# Altium PCB AFE_mezzanine_filt.PcbDoc
Units mm, origin at the board's own origin, x right, y up, seen from the top; angles counter-clockwise.
Board outline 100.05 x 34.55 mm, 2 copper layers (Top Layer, Bottom Layer), stack 1.071 mm thick; 116 components, 99 nets, 450 pads, 12 vias.
Unrouted connection lines stored in the file: 299.
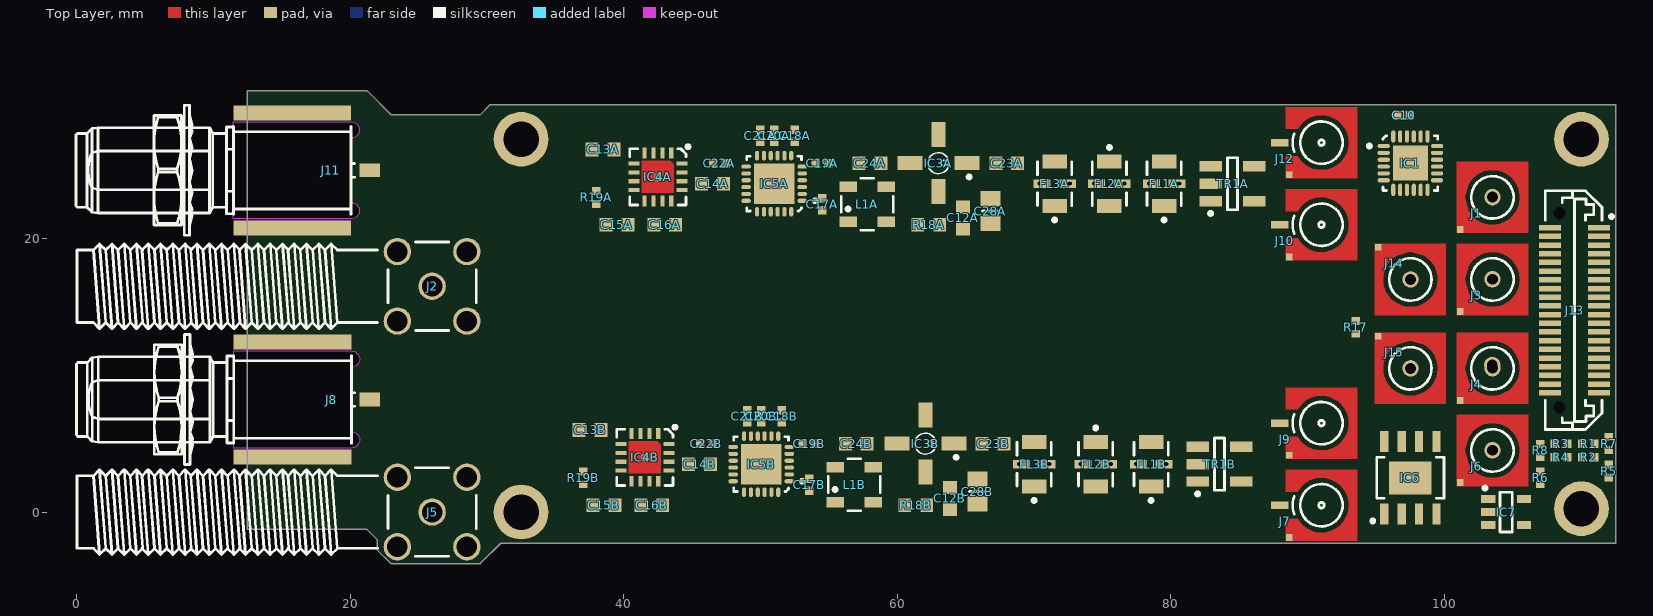
[diagram p0: Top Layer view]
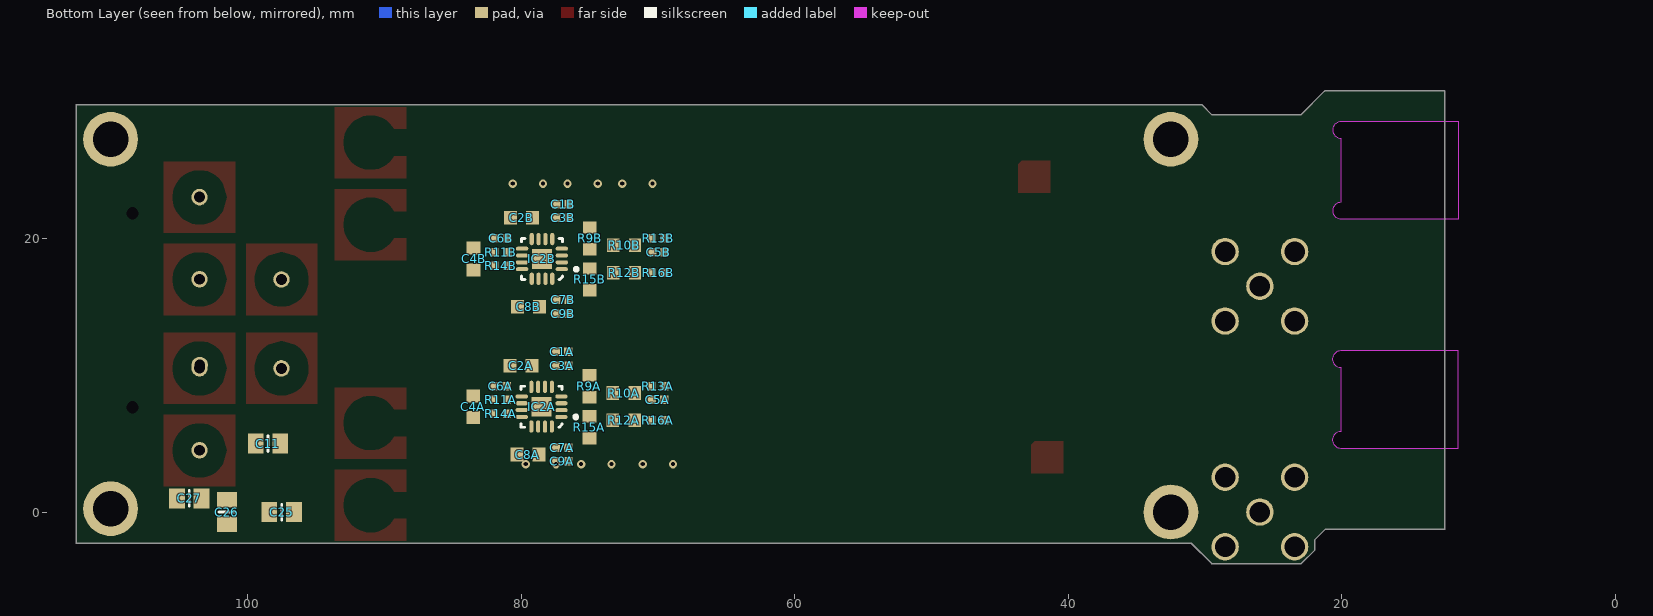
[diagram p1: Bottom Layer view, seen from below]

## Layer stack, top to bottom
Top Solder: solder mask 0.0102, Solder Resist, Dk 3.5
Top Layer: signal copper 0.0356
Dielectric1: core 1, FR-4, Dk 4.8
Bottom Layer: signal copper 0.0356
Bottom Solder: solder mask 0.0102, Solder Resist, Dk 3.5

## Board outline
21.239,-1.275 21.975,-2.011 21.975,-2.75 ccw(c22,-2.75) 21.982,-2.768 22.982,-3.768 cw(c23,-3.75) 22.982,-3.768 ccw(c23,-3.75) 23,-3.775 29.5,-3.775 ccw(c29.5,-3.75) 29.518,-3.768 31.011,-2.275 112.5,-2.275 ccw(c112.5,-2.25) 112.525,-2.25 112.525,29.75 ccw(c112.5,29.75) 112.5,29.775 30.25,29.775 ccw(c30.25,29.75) 30.232,29.768 cw(c30.25,29.75) 30.232,29.768 29.489,29.025 23.011,29.025 21.268,30.768 cw(c21.25,30.75) 21.268,30.768 ccw(c21.25,30.75) 21.25,30.775 12.5,30.775 ccw(c12.5,30.75) 12.475,30.75 12.475,-1.25 ccw(c12.5,-1.25) 12.5,-1.275

## Design rules (kind name [scope] priority, off if disabled: settings)
Clearance [All] p1: gap=0.254
DiffPairsRouting [All] p1: maxlimit=0.254 minlimit=0.254 mostfreqgap=0.254 toplayer_minwidth=0.381 toplayer_maxwidth=0.381 toplayer_prefwidth=0.381 bottomlayer_minwidth=0.381 bottomlayer_maxwidth=0.381 bottomlayer_prefwidth=0.381 maxuncoupledlength=12.7
PolygonConnect [All] p1: connectstyle=Relief reliefconductorwidth=0.254 reliefentries=4 polygonreliefangle="90 Angle" airgapwidth=0.254
RoomDefinition U_ADC_channel2 [InComponentClass('U_ADC_channel2')] p1: confinementstyle=ConfineIn formatcopy=TRUE lockcomponents=FALSE outline 67.97,23.5 85.97,23.5 85.97,13.5 67.97,13.5
RoomDefinition U_ADC_channel1 [InComponentClass('U_ADC_channel1')] p2: confinementstyle=ConfineIn formatcopy=TRUE lockcomponents=FALSE outline 68,12.7 86,12.7 86,2.7 68,2.7
RoomDefinition U_DAC_channel2 [InComponentClass('U_DAC_channel2')] p3: confinementstyle=ConfineIn formatcopy=TRUE lockcomponents=FALSE outline 35.55,-3 86.55,-3 86.55,9 35.55,9
RoomDefinition U_DAC_channel1 [InComponentClass('U_DAC_channel1')] p4: confinementstyle=ConfineIn formatcopy=TRUE lockcomponents=FALSE outline 36.5,17.5 87.5,17.5 87.5,29.5 36.5,29.5
RoomDefinition AFE_mezzanine [InComponentClass('AFE_mezzanine')] p5: confinementstyle=ConfineIn formatcopy=TRUE lockcomponents=FALSE outline 112.5,-1.75 86,-1.75 86,29.75 112.5,29.75
RoutingVias [All] p1: holewidth=0.711 width=1.27 viastyle="Through Hole" minholewidth=0.711 minwidth=1.27 maxholewidth=0.711 maxwidth=1.27
SilkToSolderMaskClearance SilkscreenOverComponentPads [IsPad] p1: minsilkscreentomaskgap=0.254 clearancetoexposedcopper=TRUE
SolderMaskExpansion [All] p1: expansion=0.102
Width [All] p1: maxlimit=0.254 minlimit=0.254 preferedwidth=0.254
28 further rules are at their usual default settings.

## Classes and differential pairs
component class U_DAC_channel2: C12B C13B C14B C15B C16B C17B C18B C19B C20B C21B C22B C23B C24B C28B FL1B FL2B FL3B IC3B IC4B IC5B L1B R18B R19B TR1B
component class U_DAC_channel1: C12A C13A C14A C15A C16A C17A C18A C19A C20A C21A C22A C23A C24A C28A FL1A FL2A FL3A IC3A IC4A IC5A L1A R18A R19A TR1A
component class U_ADC_channel2: C1B C2B C3B C4B C5B C6B C7B C8B C9B IC2B R9B R10B R11B R12B R13B R14B R15B R16B
component class U_ADC_channel1: C1A C2A C3A C4A C5A C6A C7A C8A C9A IC2A R9A R10A R11A R12A R13A R14A R15A R16A
channel class DAC_channel: U_DAC_channel1 U_DAC_channel2
channel class ADC_channel: U_ADC_channel1 U_ADC_channel2
component class AFE_mezzanine: C10 C11 C25 C26 C27 IC1 IC6 IC7 J1 J2 J3 J4 J5 J6 J7 J8 J9 J10 J11 J12 J13 J14 J15 R1 R2 R3 R4 R5 R6 R7 R8 R17
differential pair LO_IN: +LO_IN_P -LO_IN_N
differential pair DAC2_OUT: +DAC2_OUT_P -DAC2_OUT_N
differential pair DAC1_OUT: +DAC1_OUT_P -DAC1_OUT_N
differential pair ADC2_IN: +ADC2_IN_P -ADC2_IN_N
differential pair ADC1_IN: +ADC1_IN_P -ADC1_IN_N

## Components (designator, comment, footprint, x,y, rotation, side; value= is the part's Value field where it differs from the comment)
C1A "100nF" CAPC1005X55N 77,11.7 r0 bottom (schematic designator C1)
C1B "100nF" CAPC1005X55N 76.97,22.5 r0 bottom (schematic designator C1)
C2A "10uF" CAPC1608X87N 80,10.7 r180 bottom (schematic designator C2)
C2B "10uF" CAPC1608X87N 79.97,21.5 r180 bottom (schematic designator C2)
C3A "1nF" CAPC1005X55N 77,10.7 r0 bottom (schematic designator C3)
C3B "1nF" CAPC1005X55N 76.97,21.5 r0 bottom (schematic designator C3)
C4A "10pF" CAPC1608X87N 83.5,7.7 r90 bottom (schematic designator C4)
C4B "10pF" CAPC1608X87N 83.47,18.5 r90 bottom (schematic designator C4)
C5A "100nF" CAPC1005X55N 70,8.2 r180 bottom (schematic designator C5)
C5B "100nF" CAPC1005X55N 69.97,19 r180 bottom (schematic designator C5)
C6A "100nF" CAPC1005X55N 81.5,9.2 r180 bottom (schematic designator C6)
C6B "100nF" CAPC1005X55N 81.47,20 r180 bottom (schematic designator C6)
C7A "100nF" CAPC1005X55N 77,4.7 r0 bottom (schematic designator C7)
C7B "100nF" CAPC1005X55N 76.97,15.5 r0 bottom (schematic designator C7)
C8A "10uF" CAPC1608X87N 79.5,4.2 r180 bottom (schematic designator C8)
C8B "10uF" CAPC1608X87N 79.47,15 r180 bottom (schematic designator C8)
C9A "1nF" CAPC1005X55N 77,3.7 r0 bottom (schematic designator C9)
C9B "1nF" CAPC1005X55N 76.97,14.5 r0 bottom (schematic designator C9)
C10 "100nF" CAPC1005X55N 97,29 r0 top
C11 "1uF" CAPC2012X140N 98.5,5 r0 bottom
C12A "100nF" CAPC1608X87N 64.8,21.5 r270 top (schematic designator C12)
C12B "100nF" CAPC1608X87N 63.85,1 r270 top (schematic designator C12)
C13A "100nF" CAPC1608X87N 38.5,26.5 r0 top (schematic designator C13)
C13B "100nF" CAPC1608X87N 37.55,6 r0 top (schematic designator C13)
C14A "100nF" CAPC1608X87N 46.5,24 r0 top (schematic designator C14)
C14B "100nF" CAPC1608X87N 45.55,3.5 r0 top (schematic designator C14)
C15A "100nF" CAPC1608X87N 39.5,21 r0 top (schematic designator C15)
C15B "100nF" CAPC1608X87N 38.55,0.5 r0 top (schematic designator C15)
C16A "100nF" CAPC1608X87N 43,21 r0 top (schematic designator C16)
C16B "100nF" CAPC1608X87N 42.05,0.5 r0 top (schematic designator C16)
C17A "330pF" CAPC1005X55N 54.5,22.5 r90 top (schematic designator C17)
C17B "330pF" CAPC1005X55N 53.55,2 r90 top (schematic designator C17)
C18A "330pF" CAPC1005X55N 52.5,27.5 r270 top (schematic designator C18)
C18B "330pF" CAPC1005X55N 51.55,7 r270 top (schematic designator C18)
C19A "330pF" CAPC1005X55N 54.5,25.5 r180 top (schematic designator C19)
C19B "330pF" CAPC1005X55N 53.55,5 r180 top (schematic designator C19)
C20A "330pF" CAPC1005X55N 51,27.5 r270 top (schematic designator C20)
C20B "330pF" CAPC1005X55N 50.05,7 r270 top (schematic designator C20)
C21A "330pF" CAPC1005X55N 50,27.5 r270 top (schematic designator C21)
C21B "330pF" CAPC1005X55N 49.05,7 r270 top (schematic designator C21)
C22A "330pF" CAPC1005X55N 47,25.5 r0 top (schematic designator C22)
C22B "330pF" CAPC1005X55N 46.05,5 r0 top (schematic designator C22)
C23A "100nF" CAPC1608X87N 68,25.5 r0 top (schematic designator C23)
C23B "100nF" CAPC1608X87N 67,5 r0 top (schematic designator C23)
C24A "100nF" CAPC1608X87N 58,25.5 r0 top (schematic designator C24)
C24B "100nF" CAPC1608X87N 57,5 r0 top (schematic designator C24)
C25 "1uF" CAPC2012X140N 97.5,0 r180 bottom
C26 "1uF" CAPC2012X140N 101.5,0 r270 bottom
C27 "1uF" CAPC2012X140N 104.25,1 r0 bottom
C28A "1uF" CAPC2012X140N 66.8,22 r270 top (schematic designator C28)
C28B "1uF" CAPC2012X140N 65.85,1.5 r270 top (schematic designator C28)
FL1A "DC to 3000MHz" FIL_MINI-CIRCUITS_FV1206 79.5,24 r90 top (schematic designator FL1)
FL1B "DC to 3000MHz" FIL_MINI-CIRCUITS_FV1206 78.55,3.5 r90 top (schematic designator FL1)
FL2A "DC to 3000MHz" FIL_MINI-CIRCUITS_FV1206 75.5,24 r270 top (schematic designator FL2)
FL2B "DC to 3000MHz" FIL_MINI-CIRCUITS_FV1206 74.5,3.5 r270 top (schematic designator FL2)
FL3A "DC to 3000MHz" FIL_MINI-CIRCUITS_FV1206 71.5,24 r90 top (schematic designator FL3)
FL3B "DC to 3000MHz" FIL_MINI-CIRCUITS_FV1206 70,3.5 r90 top (schematic designator FL3)
IC1 "TCA9539RTWR" QFN50P400X400X80-25N-S255 97.5,25.5 r0 top
IC2A "ADA4927-1YCPZ-R2" QFN50P300X300X100-17N-S145 78.5,7.7 r0 bottom (schematic designator IC2)
IC2B "ADA4927-1YCPZ-R2" QFN50P300X300X100-17N-S145 78.47,18.5 r0 bottom (schematic designator IC2)
IC3A "ERA-2SM+" MINI-CIRCUITS_WW107 63,25.5 r180 top (schematic designator IC3)
IC3B "ERA-2SM+" MINI-CIRCUITS_WW107 62.05,5 r180 top (schematic designator IC3)
IC4A "CSWA2-63DR+" MINI-CIRCUITS_DG1293 42.5,24.5 r270 top (schematic designator IC4)
IC4B "CSWA2-63DR+" MINI-CIRCUITS_DG1293 41.55,4 r270 top (schematic designator IC4)
IC5A "HMC542BLP4E" QFN50P400X400X100-25N-S295 51,24 r180 top (schematic designator IC5)
IC5B "HMC542BLP4E" QFN50P400X400X100-25N-S295 50.05,3.5 r180 top (schematic designator IC5)
IC6 "ADP7102ARDZ-5.0-R7" SOIC127P600X175-9N-R241X309 97.5,2.5 r90 top
IC7 "ADP7182AUJZ-5.0-R7" SOT95P280X90-5N 104.5,0 r0 top
J1 "SMP" AMPHENOL_SMP-MSLD-PCT-10 103.5,23 r90 top
J2 "SMA" TELEGARTNER_J01151A0921 26,16.5 r0 top
J3 "SMP" AMPHENOL_SMP-MSLD-PCT-10 103.5,17 r90 top
J4 "SMP" AMPHENOL_SMP-MSLD-PCT-10 103.5,10.5 r90 top
J5 "SMA" TELEGARTNER_J01151A0921 26,0 r0 top
J6 "SMP" AMPHENOL_SMP-MSLD-PCT-10 103.5,4.5 r90 top
J7 "SMP" MOLEX_85305-0232 91,0.5 r90 top
J8 "SMA" TELEGARTNER_J01151A0451 21.45,8.224 r180 top
J9 "SMP" MOLEX_85305-0232 91,6.5 r90 top
J10 "SMP" MOLEX_85305-0232 91,21 r90 top
J11 "SMA" TELEGARTNER_J01151A0451 21.425,24.975 r180 top
J12 "SMP" MOLEX_85305-0232 91,27 r90 top
J13 "Familly" SAMTEC_LSS-120-03-L-DV-A 109.5,14.75 r90 top
J14 "SMP" AMPHENOL_SMP-MSLD-PCT-10 97.5,17 r0 top
J15 "SMP" AMPHENOL_SMP-MSLD-PCT-10 97.5,10.5 r0 top
L1A "0.5uH@200mA" IND_MINI-CIRCUITS_GU1604 57.8,22.5 r90 top (schematic designator L1)
L1B "0.5uH@200mA" IND_MINI-CIRCUITS_GU1604 56.85,2 r90 top (schematic designator L1)
R1 "10k" RESC1005X40N 110.5,5 r0 top
R2 "10k" RESC1005X40N 110.5,4 r0 top
R3 "1k" RESC1005X40N 108.5,5 r0 top
R4 "1k" RESC1005X40N 108.5,4 r0 top
R5 "1k" RESC1005X40N 112,3 r90 top
R6 "1k" RESC1005X40N 107,2.5 r90 top
R7 "10k" RESC1005X40N 112,5 r90 top
R8 "10k" RESC1005X40N 107,4.5 r90 top
R9A "332" RESC1608X55N 75,9.2 r90 bottom (schematic designator R9)
R9B "332" RESC1608X55N 74.97,20 r90 bottom (schematic designator R9)
R10A "332" RESC1608X55N 72.5,8.7 r0 bottom (schematic designator R10)
R10B "332" RESC1608X55N 72.47,19.5 r0 bottom (schematic designator R10)
R11A "49R9" RESC1005X40N 81.5,8.2 r180 bottom (schematic designator R11)
R11B "49R9" RESC1005X40N 81.47,19 r180 bottom (schematic designator R11)
R12A "332" RESC1608X55N 72.5,6.7 r0 bottom (schematic designator R12)
R12B "332" RESC1608X55N 72.47,17.5 r0 bottom (schematic designator R12)
R13A "56" RESC1005X40N 70,9.2 r0 bottom (schematic designator R13)
R13B "56" RESC1005X40N 69.97,20 r0 bottom (schematic designator R13)
R14A "49R9" RESC1005X40N 81.5,7.2 r180 bottom (schematic designator R14)
R14B "49R9" RESC1005X40N 81.47,18 r180 bottom (schematic designator R14)
R15A "332" RESC1608X55N 75,6.2 r270 bottom (schematic designator R15)
R15B "332" RESC1608X55N 74.97,17 r270 bottom (schematic designator R15)
R16A "56" RESC1005X40N 70,6.7 r0 bottom (schematic designator R16)
R16B "56" RESC1005X40N 69.97,17.5 r0 bottom (schematic designator R16)
R17 "100" RESC1005X40N 93.5,13.5 r90 top
R18A "110" RESC1608X55N 62.3,21 r180 top (schematic designator R18)
R18B "110" RESC1608X55N 61.35,0.5 r180 top (schematic designator R18)
R19A "49R9" RESC1005X40N 38,23 r90 top (schematic designator R19)
R19B "49R9" RESC1005X40N 37.05,2.5 r90 top (schematic designator R19)
TR1A "1:1" XFMR_MINI-CIRCUITS_AT224 84.5,24 r90 top (schematic designator TR1)
TR1B "1:1" XFMR_MINI-CIRCUITS_AT224 83.55,3.5 r90 top (schematic designator TR1)

## Footprints (in the part's own frame and the unit in brackets; to place one, negate y for a bottom-side part, rotate by r counter-clockwise, add the part's x,y. Pads: shape width x height; smd on the part's side, far side on the other; paste and mask are expansions set on the pad)
AMPHENOL_SMP-MSLD-PCT-10 [mm]
  round 1.2 hole 0.8: 1(0.017,0)
  rect 0.5x0.5 smd paste-0.25 mask-0.25: 2(-2.35,2.35)
  Top Layer region: -2.6,-2.6 -2.6,2.6 1,2.6 0,2.032 -1,1.732 -1.732,1 -2,0 -1.732,-1 -1,-1.732 0,-2 1,-1.732 1.732,-1 2,0 1.732,1 1,1.732 1,1.732 0,2.032 1,2.6 2.6,2.6 2.6,-2.6
  silkscreen extent -1.55,-1.55 1.55,1.55, body extent -2.52,-2.5 2.48,2.5, height 4.2
CAPC1005X55N [mm] "Chip Capacitor, Body 1.0x0.55mm, IPC Medium Density"
  rect 0.62x0.62 smd: 1(-0.45,0) 2(0.45,0)
  body extent -0.52,-0.27 0.53,0.28, height 0.55
CAPC1608X87N [mm] "Chip Capacitor, Body 1.6x0.8mm IPC Medium Density"
  rect 0.95x1 smd: 1(-0.8,0) 2(0.8,0)
  body extent -0.87,-0.47 0.88,0.48, height 0.87
CAPC2012X140N [mm] "Chip Capacitor, Body 2.0x1.25mm, IPC Medium Density"
  rect 1.15x1.45 smd: 1(-0.9,0) 2(0.9,0)
  silkscreen extent 0,-0.58 0,0.58, body extent -1.05,-0.67 1.05,0.68, height 1.3
FIL_MINI-CIRCUITS_FV1206 [mm] "MINI-CIRCUITS Case FV1206 - Body 3.2x1.6mm"
  rect 1.04x1.8 smd: 1(-1.625,0) 3(1.625,0)
  rect 0.61x1.245 smd: 2(0,-0.928) 4(0,0.927)
  silkscreen extent -2.77,-1.25 1.6,1.25, body extent -1.6,-0.8 1.6,0.8, height 0.94
IND_MINI-CIRCUITS_GU1604 [mm] "MINI-CIRCUITS RF Choke, Case GU1041 - Body 3.81X3.81mm"
  rect 0.76x1.27 smd: 1(-1.27,1.394) 2(1.27,1.396) 3(1.27,-1.394) 4(-1.27,-1.396)
  silkscreen extent -1.91,-1.91 1.91,1.91, body extent -1.9,-1.9 1.91,1.91, height 3.81
MINI-CIRCUITS_DG1293 [mm] "MINI-CIRCUITS DG1293 Case, 0.65mm Pitch, Square; 4 Pin X 4 Pin, 4mm X 4mm Body (w/Thermal Tab 2.34 X 2.34mm)"
  rect 0.8x0.3 smd: 1(-1.75,0.975) 2(-1.75,0.325) 3(-1.75,-0.325) 4(-1.75,-0.975) 9(1.75,-0.975) 10(1.75,-0.325) 11(1.75,0.325) 12(1.75,0.975)
  rect 0.3x0.8 smd: 5(-0.975,-1.75) 6(-0.325,-1.75) 7(0.325,-1.75) 8(0.975,-1.75) 13(0.975,1.75) 14(0.325,1.75) 15(-0.325,1.75) 16(-0.975,1.75)
  rect 0.5x0.5 smd paste-0.25 mask-0.25: 17(0,0)
  Top Layer region: -1.17,-1.17 1.17,-1.17 1.17,1.17 -0.92,1.17 -1.17,0.92
  silkscreen extent -2.32,-2.05 2.05,2.33, body extent -2.05,-2.05 2.06,2.06, height 1.2
MINI-CIRCUITS_WW107 [mm] "MINI-CIRCUITS WW107 Case"
  rect 1.83x1.02 smd: 1(-2.085,0) 3(2.085,0)
  rect 1.02x1.83 smd: 2(0,-2.085) 4(0,2.085)
  silkscreen extent -2.38,-0.77 0.77,1.12, body extent -2.84,-2.54 2.54,2.54, height 1.52
MOLEX_85305-0232 [mm] "50 Ohms, SMP Surface Mount Plug, Limited Detent"
  rect 0.54x1.3 smd: 1(0,3.05)
  rect 0.5x0.5 smd paste-0.25 mask-0.25: 2(-2.35,2.35)
  Top Layer region: -2.6,-2.6 -2.6,2.6 -1,2.6 -1,1.732 -1.732,1 -2,0 -1.732,-1 -1,-1.732 0,-2 1,-1.732 1.732,-1 2,0 1.732,1 1,1.732 1,1.732 1,2.6 2.6,2.6 2.6,-2.6
  silkscreen extent -1.55,-1.55 1.55,2.1, body extent -2.54,-2.54 2.54,3.54, height 4.1
QFN50P300X300X100-17N-S145 [mm] "QFN,0.50mm Pitch, Square; 4 Pin X 4 Pin, 3mm X 3mm X 1.00mm H Body (w/Thermal Tab 1.45 X 1.45mm), IPC Medium Density"
  oval 0.9x0.3 smd: 1(-1.45,0.75) 2(-1.45,0.25) 3(-1.45,-0.25) 4(-1.45,-0.75) 9(1.45,-0.75) 10(1.45,-0.25) 11(1.45,0.25) 12(1.45,0.75)
  oval 0.3x0.9 smd: 5(-0.75,-1.45) 6(-0.25,-1.45) 7(0.25,-1.45) 8(0.75,-1.45) 13(0.75,1.45) 14(0.25,1.45) 15(-0.25,1.45) 16(-0.75,1.45)
  rect 1.45x1.45 smd: 17(0,0)
  silkscreen extent -2.62,-1.5 1.5,1.5, body extent -1.57,-1.57 1.58,1.58, height 1
QFN50P400X400X80-25N-S255 [mm] "QFN, 0.50mm Pitch, Square; 6 Pin X 6 Pin, 4mm X 4mm Body (w/Thermal Tab 2.55 X 2.55 mm), IPC Medium Density"
  oval 0.9x0.3 smd: 1(-1.95,1.25) 2(-1.95,0.75) 3(-1.95,0.25) 4(-1.95,-0.25) 5(-1.95,-0.75) 6(-1.95,-1.25) 13(1.95,-1.25) 14(1.95,-0.75) 15(1.95,-0.25) 16(1.95,0.25) 17(1.95,0.75) 18(1.95,1.25)
  oval 0.3x0.9 smd: 7(-1.25,-1.95) 8(-0.75,-1.95) 9(-0.25,-1.95) 10(0.25,-1.95) 11(0.75,-1.95) 12(1.25,-1.95) 19(1.25,1.95) 20(0.75,1.95) 21(0.25,1.95) 22(-0.25,1.95) 23(-0.75,1.95) 24(-1.25,1.95)
  rect 2.55x2.55 smd: 25(0,0)
  silkscreen extent -3.12,-2 2,2, body extent -2.07,-2.07 2.08,2.08, height 0.8
QFN50P400X400X100-25N-S295 [mm] "QFN,0.50mm pitch,square;24 pin,4.00mm L X 4.00mm W X 1.00mm H body (w/thermal tab 2.95 X 2.95mm),  IPC Medium Density"
  oval 0.7x0.3 smd: 1(-2.05,1.25) 2(-2.05,0.75) 3(-2.05,0.25) 4(-2.05,-0.25) 5(-2.05,-0.75) 6(-2.05,-1.25) 13(2.05,-1.25) 14(2.05,-0.75) 15(2.05,-0.25) 16(2.05,0.25) 17(2.05,0.75) 18(2.05,1.25)
  oval 0.3x0.7 smd: 7(-1.25,-2.05) 8(-0.75,-2.05) 9(-0.25,-2.05) 10(0.25,-2.05) 11(0.75,-2.05) 12(1.25,-2.05) 19(1.25,2.05) 20(0.75,2.05) 21(0.25,2.05) 22(-0.25,2.05) 23(-0.75,2.05) 24(-1.25,2.05)
  rect 2.95x2.95 smd: 25(0,0)
  silkscreen extent -3.13,-2 2,2, body extent -2.07,-2.07 2.08,2.08, height 1
RESC1005X40N [mm] "Chip Resistor, EIA 0402, Metric 1005, Body 1.0x0.5mm, IPC Medium Density"
  rect 0.58x0.62 smd: 1(-0.47,0) 2(0.47,0)
  body extent -0.52,-0.27 0.53,0.28, height 0.4
RESC1608X55N [mm] "Chip Resistor, EIA 0603, Metric 1608, Body 1.6x0.8mm, IPC Medium Density"
  rect 0.9x1 smd: 1(-0.8,0) 2(0.8,0)
  body extent -0.87,-0.47 0.88,0.48, height 0.55
SAMTEC_LSS-120-03-L-DV-A [mm] "40 Contacts, Pitch 0.635mm, Razor Beam LSS Vertical High Speed Hermaphroditic Strip (Lead Style 5.49mm)"
  rect 0.4x1.6 smd: 1(6.032,-1.8) 2(6.032,1.8) 3(5.397,-1.8) 4(5.397,1.8) 5(4.763,-1.8) 6(4.763,1.8) 7(4.127,-1.8) 8(4.127,1.8) 9(3.492,-1.8) 10(3.492,1.8) 11(2.857,-1.8) 12(2.857,1.8) 13(2.222,-1.8) 14(2.222,1.8) 15(1.588,-1.8) 16(1.587,1.8) 17(0.953,-1.8) 18(0.952,1.8) 19(0.318,-1.8) 20(0.317,1.8) 21(-0.317,-1.8) 22(-0.318,1.8) 23(-0.952,-1.8) 24(-0.953,1.8) 25(-1.587,-1.8) 26(-1.588,1.8) 27(-2.222,-1.8) 28(-2.222,1.8) 29(-2.857,-1.8) 30(-2.857,1.8) 31(-3.492,-1.8) 32(-3.492,1.8) 33(-4.127,-1.8) 34(-4.127,1.8) 35(-4.763,-1.8) 36(-4.763,1.8) 37(-5.397,-1.8) 38(-5.397,1.8) 39(-6.032,-1.8) 40(-6.032,1.8)
  round 0.5 hole 0.9 unplated mask+0.2: P1(-7.1,1.1) P2(7.1,1.1)
  silkscreen extent -8.72,-2.83 8.72,2.14, body extent -8.72,-2.3 8.73,2.3, height 5.3
SOIC127P600X175-9N-R241X309 [mm] "SOIC 8, Pitch 1.27mm - Body 3.9x4.9mm, (w/thermal tab 2.41mm X 3.098mm), IPC Medium Density"
  rect 1.55x0.6 smd: 1(-2.65,1.905) 2(-2.65,0.635) 3(-2.65,-0.635) 4(-2.65,-1.905) 5(2.65,-1.905) 6(2.65,-0.635) 7(2.65,0.635) 8(2.65,1.905)
  rect 2.41x3.098 smd: 9(0,0)
  silkscreen extent -3.27,-2.45 1.5,2.87, body extent -3.1,-2.5 3.1,2.5, height 1.75
SOT95P280X90-5N [mm] "SOT, 0.95mm Pitch; 5 Pin, 1.60mm W X 2.90mm L X 0.90mm H body, IPC Medium"
  rect 1.05x0.6 smd: 1(-1.3,0.95) 2(-1.3,0) 3(-1.3,-0.95) 4(1.3,-0.95) 5(1.3,0.95)
  silkscreen extent -1.67,-1.45 0.45,1.87, body extent -1.4,-1.5 1.4,1.5, height 0.9
TELEGARTNER_J01151A0451 [mm] "SMA 50 ohm Edge Mount Bulkhead Jack Receptacle"
  rect 1.5x1 smd: 1(0,0)
  rect 8.6x1.1 smd: 2(5.65,4.2) 2(5.65,-4.2)
  Keep-Out Layer board cut-out: 1.35,-3.55 1.09,-3.491 0.881,-3.324 0.765,-3.084 0.765,-2.816 0.881,-2.576 1.09,-2.409 1.35,-2.35 1.35,-2.35 1.35,2.35 1.09,2.409 0.881,2.576 0.765,2.816 0.765,3.084 0.881,3.324 1.09,3.491 1.35,3.55 1.35,3.55 9.95,3.55 9.95,-3.55
  silkscreen extent 1.1,-4.75 21.45,4.75, body extent -0.65,-4.75 21.45,4.75, height 5.25
TELEGARTNER_J01151A0921 [mm]
  round 2 hole 1.5: 1(0,0) 2(-2.54,-2.54) 2(-2.54,2.54) 2(2.54,-2.54) 2(2.54,2.54)
  silkscreen extent -25.95,-3.23 3.23,3.23, body extent -26,-4.25 3.5,4.25, height 11.25
XFMR_MINI-CIRCUITS_AT224 [mm] "MINI-CIRCUITS RF Transformer, Case AT224 - Body 3.81X3.81mm"
  rect 0.76x1.65 smd: 1(-1.27,1.59) 2(0,1.59) 3(1.27,1.59) 4(1.27,-1.59) 6(-1.27,-1.59)
  silkscreen extent -2.3,-0.37 1.91,1.72, body extent -1.9,-1.9 1.91,1.91, height 3.81

## Part data
C1A C1B C5A C5B C6A C6B C7A C7B C10: library part CC0402_100NF_16V_10%_X5R, "Non-polarised capacitor"
C2A C2B C8A C8B: library part CC0603_10UF_6.3V_20%_X5R, "Non-polarised capacitor"
C3A C3B C9A C9B: library part CC0402_1NF_50V_10%_X7R, "Non-polarised capacitor"
C4A C4B: library part CC0603_10PF_50V_5%_NP0, "Non-polarised capacitor"
C11 C25 C26 C27 C28A C28B: library part CC0805_1UF_35V_20%_X7R, "Non-polarised capacitor"
C12A C12B C13A C13B C14A C14B C15A C15B C16A C16B C23A C23B C24A C24B: library part CC0603_100NF_50V_10%_X7R, "Non-polarised capacitor"
C17A C17B C18A C18B C19A C19B C20A C20B C21A C21B C22A C22B: library part CC0402_330PF_50V_10%_X7R, "Non-polarised capacitor"
FL1A FL1B FL2A FL2B FL3A FL3B: library part FIL_MINI-CIRCUITS_LFCN-3000+, "50 Ohm DC to 3000MHz Low Pass Filter"
IC1: "Low-Voltage 16-Bit I2C and SMBus I/O Expander"
IC2A IC2B: "Ultralow Distortion Current Feedback Differential ADC Driver"
IC3A IC3B: "DC-5GHz Monolithic Amplifier"
IC4A IC4B: "Absorptive SPDT RF Switch with Internal Driver, 50 Ohms, 500 to 6000MHz"
IC5A IC5B: "0.5dB LSB GaAs MMIC 6-bit Digital Serial Control Attenuator, DC - 4GHz"
IC6: "300 mA, Low Noise, CMOS LDO Linear Regulator"
IC7: "–5V, 200 mA, Low Noise, Linear Regulator"
J1 J3 J4 J6 J14 J15: "50 Ohms, SMP Surface/THT Mount Plug, Limited Detent"
J2 J5: "RiSMA 50 Ohms Right Angle PCB Jack"
J7 J9 J10 J12: library part MOLEX_85305-0232
J8 J11: library part TELEGARTNER_J01151A0451
J13: library part SAMTEC_LSS-120-03-L-DV-A, "Connector 40 Hermaphroditic"
L1A L1B: library part IND_MINI-CIRCUITS_TCCH-80+, "50 Ohms, 50 to 8200 MHz RF Choke"
R1 R2 R7 R8: library part R0402_10K_1%_0.0625W_100PPM, "Resistor - 1%"
R3 R4 R5 R6: library part R0402_1K_1%_0.0625W_100PPM, "Resistor - 1%"
R9A R9B R10A R10B R12A R12B R15A R15B: library part R0603_332R_0.1%_0.063W_10PPM, "Resistor - 0.1%"
R11A R11B R14A R14B R19A R19B: library part R0402_49R9_1%_0.0625W_100PPM, "Resistor - 1%"
R13A R13B R16A R16B: library part R0402_56R_1%_0.0625W_100PPM, "Resistor - 1%"
R17: library part R0402_100R_1%_0.0625W_100PPM, "Resistor - 1%"
R18A R18B: library part R0603_110R_1%_0.1W_100PPM, "Resistor - 1%"
TR1A TR1B: library part XFMR_MINI-CIRCUITS_TC1-1-13M+, "50 Ohms 4.5 To 3000MHz RF Transformers"

## Free pads (board coordinates)
  round 4 hole 2.6: 0(32.5,27.25) 0(110,27.25) 1(32.5,0) 1(110,0.25)
  round 1.2 hole 0.8: 0(103.483,10.75)

## Via types
v1: diameter 0.6, hole 0.3, Top Layer to Bottom Layer, 12 vias

## Nets (pads, with @x,y where several pads share a name; then routed paths per layer and width w, separated by ;. In a path a pad name is that pad's centre, name@x,y a point inside that pad or via, vN(x,y) a via of type N, cw(c..) or ccw(c..) an arc to the next point about the centre after c; other vN are vias at no path point)
ADC1_IN_N: C4B.1 J3.1 R14B.1
ADC1_IN_P: C4B.2 J1.1 R11B.1
ADC2_IN_N: C4A.1 J6.1 R14A.1
ADC2_IN_P: C4A.2 J4.1 R11A.1
ADC_CH0: J13.37 R1.1 R3.2
ADC_CH1: J13.38 R2.1 R4.2
ADC_CH2: J13.39 R5.2 R7.1
ADC_CH3: J13.40 R6.2 R8.1
DAC1_OUT_N: J9.1 TR1B.4
DAC1_OUT_P: J7.1 TR1B.6
DAC2_OUT_N: J12.1 TR1A.4
DAC2_OUT_P: J10.1 TR1A.6
GND: C1A.1 C1B.1 C2A.1 C2B.1 C3A.1 C3B.1 C6A.1 C6B.1 C7A.1 C7B.1 C8A.1 C8B.1 C9A.1 C9B.1 C10.1 C11.1 C12A.1 C12B.1 C16A.1 C16B.1 C17A.1 C17B.1 C18A.1 C18B.1 C19A.1 C19B.1 C20A.1 C20B.1 C21A.1 C21B.1 C22A.1 C22B.1 C25.1 C26.1 C27.1 C28A.1 C28B.1 FL1A.2 FL1A.4 FL1B.2 FL1B.4 FL2A.2 FL2A.4 FL2B.2 FL2B.4 FL3A.2 FL3A.4 FL3B.2 FL3B.4 IC1.9 IC1.18 IC1.23 IC2A.17 IC2B.17 IC3A.2 IC3A.4 IC3B.2 IC3B.4 IC4A.1 IC4A.2 IC4A.3 IC4A.5 IC4A.6 IC4A.7 IC4A.8 IC4A.10 IC4A.11 IC4A.14 IC4A.16 IC4A.17 IC4B.1 IC4B.2 IC4B.3 IC4B.5 IC4B.6 IC4B.7 IC4B.8 IC4B.10 IC4B.11 IC4B.14 IC4B.16 IC4B.17 IC5A.25 IC5B.25 IC6.3 IC6.6 IC6.9 IC7.1 J1.2 J2.2 J3.2 J4.2 J5.2 J6.2 J7.2 J8.2 J9.2 J10.2 J11.2 J12.2 J13.1 J13.2 J13.23 J13.24 J13.29 J13.30 J13.35 J13.36 J14.2 J15.2 R3.1 R4.1 R13A.1 R13B.1 R16A.1 R16B.1 R19A.2 R19B.2 TR1A.3 TR1B.3
  other v1: 68.895,3.5 71.105,3.5 73.395,3.5 75.605,3.5 77.445,3.5 79.655,3.5
LO_IN_N: J14.1 R17.2
LO_IN_P: J15.1 R17.1
MEZZ_IO0: IC1.1 J13.3
MEZZ_IO1: IC1.2 J13.4
MEZZ_IO2: IC1.3 J13.5
MEZZ_IO3: IC1.4 J13.6
MEZZ_IO4: IC1.5 J13.7
MEZZ_IO5: IC1.6 J13.8
MEZZ_IO6: IC1.7 J13.9
MEZZ_IO7: IC1.8 J13.10
MEZZ_IO8: IC1.10 J13.11
MEZZ_IO9: IC1.11 J13.12
MEZZ_IO10: IC1.12 J13.13
MEZZ_IO11: IC1.13 J13.14
MEZZ_IO12: IC1.14 J13.15
MEZZ_IO13: IC1.15 J13.16
MEZZ_IO14: IC1.16 J13.17
MEZZ_IO15: IC1.17 J13.18
N5V0A: C7A.2 C7B.2 C8A.2 C8B.2 C9A.2 C9B.2 C27.2 IC2A.13 IC2A.14 IC2A.15 IC2A.16 IC2B.13 IC2B.14 IC2B.15 IC2B.16 IC7.5
N6V0A: C26.2 IC7.2 IC7.3 J13.31 R7.2
N12V0A: J13.25 R8.2
NetC5A_1: C5A.1 R10A.1 R13A.2
NetC5B_1: C5B.1 R10B.1 R13B.2
NetC13A_2: C13A.2 IC4A.4
NetC13B_2: C13B.2 IC4B.4
NetC14A_1: C14A.1 IC4A.15
NetC14A_2: C14A.2 IC5A.15
NetC14B_1: C14B.1 IC4B.15
NetC14B_2: C14B.2 IC5B.15
NetC15A_1: C15A.1 R19A.1
NetC15A_2: C15A.2 IC4A.9
NetC15B_1: C15B.1 R19B.1
NetC15B_2: C15B.2 IC4B.9
NetC16A_2: C16A.2 IC4A.12
NetC16B_2: C16B.2 IC4B.12
NetC17A_2: C17A.2 IC5A.2
NetC17B_2: C17B.2 IC5B.2
NetC18A_2: C18A.2 C19A.2 IC5A.6 IC5A.7 IC5A.8 IC5A.9
NetC18B_2: C18B.2 C19B.2 IC5B.6 IC5B.7 IC5B.8 IC5B.9
NetC20A_2: C20A.2 IC5A.10
NetC20B_2: C20B.2 IC5B.10
NetC21A_2: C21A.2 IC5A.11
NetC21B_2: C21B.2 IC5B.11
NetC22A_2: C22A.2 IC5A.13
NetC22B_2: C22B.2 IC5B.13
NetC23A_1: C23A.1 IC3A.1
NetC23A_2: C23A.2 FL3A.3
NetC23B_1: C23B.1 IC3B.1
NetC23B_2: C23B.2 FL3B.3
NetC24A_1: C24A.1 IC5A.4
NetC24A_2: C24A.2 IC3A.3 L1A.3
NetC24B_1: C24B.1 IC5B.4
NetC24B_2: C24B.2 IC3B.3 L1B.3
NetFL1A_1: FL1A.1 TR1A.1
NetFL1A_3: FL1A.3 FL2A.1
NetFL1B_1: FL1B.1 TR1B.1
NetFL1B_3: FL1B.3 FL2B.1
NetFL2A_3: FL2A.3 FL3A.1
NetFL2B_3: FL2B.3 FL3B.1
NetIC2A_1: IC2A.1 R15A.2
NetIC2A_2: IC2A.2 R12A.2 R15A.1
NetIC2A_3: IC2A.3 R9A.1 R10A.2
NetIC2A_4: IC2A.4 R9A.2
NetIC2A_10: IC2A.10 R11A.2
NetIC2A_11: IC2A.11 R14A.2
NetIC2B_1: IC2B.1 R15B.2
NetIC2B_2: IC2B.2 R12B.2 R15B.1
NetIC2B_3: IC2B.3 R9B.1 R10B.2
NetIC2B_4: IC2B.4 R9B.2
NetIC2B_10: IC2B.10 R11B.2
NetIC2B_11: IC2B.11 R14B.2
NetL1A_1: L1A.1 R18A.2
NetL1B_1: L1B.1 R18B.2
NetR12A_1: R12A.1 R16A.2
NetR12B_1: R12B.1 R16B.2
P3V3: C10.2 IC1.21 IC1.24 J13.19 R5.1 R6.1
P5V0A: C1A.2 C1B.2 C2A.2 C2B.2 C3A.2 C3B.2 C25.2 IC2A.5 IC2A.6 IC2A.7 IC2A.8 IC2A.12 IC2B.5 IC2B.6 IC2B.7 IC2B.8 IC2B.12 IC6.1 IC6.2
P6V0A: C11.2 IC6.5 IC6.8 J13.32 J13.34 R2.2
P12V0A: C12A.2 C12B.2 C28A.2 C28B.2 J13.26 R1.2 R18A.1 R18B.1
RF1_IN: C5B.2 J2.1
RF1_OUT: C13B.1 J8.1
RF2_IN: C5A.2 J5.1
RF2_OUT: C13A.1 J11.1
SCL: IC1.19 J13.21
SDA: IC1.20 J13.22
VCM: C6A.2 C6B.2 IC2A.9 IC2B.9 J13.33
pads on no net: IC1.22 IC1.25 IC4A.13 IC4B.13 IC5A.1 IC5A.3 IC5A.5 IC5A.12 IC5A.14 IC5A.16 IC5A.17 IC5A.18 IC5A.19 IC5A.20 IC5A.21 IC5A.22 IC5A.23 IC5A.24 IC5B.1 IC5B.3 IC5B.5 IC5B.12 IC5B.14 IC5B.16 IC5B.17 IC5B.18 IC5B.19 IC5B.20 IC5B.21 IC5B.22 IC5B.23 IC5B.24 IC6.4 IC6.7 IC7.4 J13.20 J13.27 J13.28 J13.P1 J13.P2 L1A.2 L1A.4 L1B.2 L1B.4 TR1A.2 TR1B.2
copper on no net:
  other v1: 70.395,24 72.605,24 74.395,24 76.605,24 78.395,24 80.605,24

## Silkscreen, mask and mechanical layers (free items; w line width, h text height)
Mechanical 1:
  lines w0.05: 0,19.25 0,16.75 29.5,16.75 ; 12.5,30.75 21.25,30.75 21.75,30.25 23,29 29.5,29 30.25,29.75 40.5,29.75 112.5,29.75 112.5,-2.25 31,-2.25 30,-3.25 29.5,-3.75 23,-3.75 22,-2.75 22,-2.25 22,-2 21.25,-1.25 12.5,-1.25 12.5,30.75 ; 12.5,30.75 13.5,30.75 12.5,30.75
Mechanical 2:
  lines w0.127: 19.67,28.382 20.671,28.382 ; 20.67,12.382 21.671,12.382

## Text inside footprints (layer, text, board x,y; h text height)
FL1A: Drill Drawing "capped via" at 80.05,21.55 h0.5 r90; Drill Drawing "Filled and" at 79.3,21.6 h0.5 r90
FL1B: Drill Drawing "capped via" at 79.1,1.05 h0.5 r90; Drill Drawing "Filled and" at 78.35,1.1 h0.5 r90
FL2A: Drill Drawing "capped via" at 74.95,26.45 h0.5 r270; Drill Drawing "Filled and" at 75.7,26.4 h0.5 r270
FL2B: Drill Drawing "capped via" at 73.95,5.95 h0.5 r270; Drill Drawing "Filled and" at 74.7,5.9 h0.5 r270
FL3A: Drill Drawing "capped via" at 72.05,21.55 h0.5 r90; Drill Drawing "Filled and" at 71.3,21.6 h0.5 r90
FL3B: Drill Drawing "capped via" at 70.55,1.05 h0.5 r90; Drill Drawing "Filled and" at 69.8,1.1 h0.5 r90
J8: Drill Drawing "r0.6" at 18.914,5.991 h1 r180; Drill Drawing "8.6" at 16.688,9.833 h1 r180; Drill Drawing "7.1" at 18.45,10.224 h1 r270; Mechanical 8 "2.5mm" at 13.45,6.974 h1 r180; Mechanical 8 "3mm" at 8.4,6.949 h1 r180
J11: Drill Drawing "r0.6" at 18.889,22.742 h1 r180; Drill Drawing "8.6" at 16.663,26.583 h1 r180; Drill Drawing "7.1" at 13.536,25.219 h1 r270; Mechanical 8 "2.5mm" at 13.425,23.725 h1 r180; Mechanical 8 "3mm" at 8.375,23.7 h1 r180